# Altium PCB Adapter.PcbDoc
Units mm, origin at the board's own origin, x right, y up, seen from the top; angles counter-clockwise.
Board outline 6.73 x 7.49 mm, 2 copper layers (Top Layer, Bottom Layer); 2 components, 4 nets, 11 pads, 4 vias.
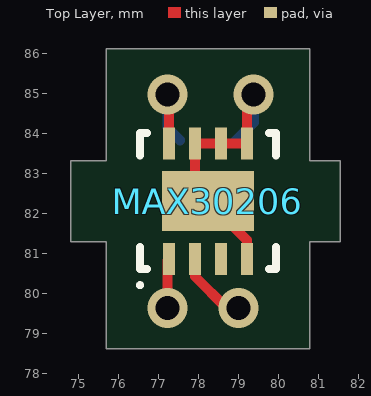
[diagram p0: Top Layer view]
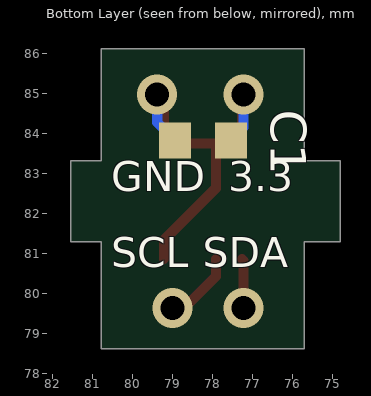
[diagram p1: Bottom Layer view, seen from below]

## Layer stack, top to bottom
Top Solder: solder mask 0.0102, Solder Resist, Dk 3.5
Top Layer: signal copper 0.0356
Dielectric 1: dielectric 0.32, FR-4, Dk 4.8
Bottom Layer: signal copper 0.0356
Bottom Solder: solder mask 0.0102, Solder Resist, Dk 3.5

## Board outline
74.803,81.28 74.803,83.312 75.692,83.312 75.692,86.106 80.772,86.106 80.772,83.312 81.534,83.312 81.534,81.28 80.772,81.28 80.772,78.613 75.692,78.613 75.692,81.28

## Design rules (kind name [scope] priority, off if disabled: settings)
Clearance [All] p1: gap=0.254 ignorepadtopadclearanceinfootprint=FALSE except(0: Arc-Hole Track-Hole SMDPad-Hole THPad-Hole Via-Hole Fill-Hole Poly-Hole Region-Hole Text-Hole)
PolygonConnect [All] p1: connectstyle=Relief reliefconductorwidth=0.254 reliefentries=4 polygonreliefangle="90 Angle" airgapwidth=0.254
RoutingVias [All] p1: holewidth=0.711 width=1.27 viastyle="Through Hole" minholewidth=0.711 minwidth=1.27 maxholewidth=0.711 maxwidth=1.27
SolderMaskExpansion [All] p1: expansion=0.102
Width [All] p1: maxlimit=0.254 minlimit=0.254 preferedwidth=0.254
30 further rules are at their usual default settings.

## Components (designator, comment, footprint, x,y, rotation, side; value= is the part's Value field where it differs from the comment)
C1 "Cap" "0603 Cap" 78.232,83.82 r180 bottom value=100n
MAX30206 "MAX30205" MAX30205 78.232,82.296 r90 top

## Footprints (in the part's own frame and the unit in brackets; to place one, negate y for a bottom-side part, rotate by r counter-clockwise, add the part's x,y. Pads: shape width x height; smd on the part's side, far side on the other; paste and mask are expansions set on the pad)
"0603 Cap" [mm] "Chip Capacitor, Body 1.6x0.8mm, IPC High Density"
  rect 0.8x0.9 smd: 1(-0.7,0) 2(0.7,0)
  body extent -0.8,-0.4 0.8,0.4, height 0.78
MAX30205 [mm] "SON, 8-Leads, Body 3,00x3,00mm, Pitch 0,65mm, Thermal Pad 2,30x1,50mm, IPC Medium Density"
  rect 0.8x0.3 smd mask+0: 1(-1.445,0.975) 2(-1.445,0.325) 3(-1.445,-0.325) 4(-1.445,-0.975) 5(1.445,-0.975) 6(1.445,-0.325) 7(1.445,0.325) 8(1.445,0.975)
  rect 1.5x2.3 smd: 9(0,0)
  silkscreen extent -2.15,-1.7 1.7,1.75, body extent -1.55,-1.55 1.55,1.55, height 0.8

## Part data
MAX30206: Supplier 1=Farnell, Supplier Part Number 1=MAX30205

## Via types
v1: diameter 1, hole 0.6, Top Layer to Bottom Layer, 4 vias

## Nets (pads, with @x,y where several pads share a name; then routed paths per layer and width w, separated by ;. In a path a pad name is that pad's centre, name@x,y a point inside that pad or via, vN(x,y) a via of type N, cw(c..) or ccw(c..) an arc to the next point about the centre after c; other vN are vias at no path point)
GND: C1.1 MAX30206.4 MAX30206.5 MAX30206.6 MAX30206.7 MAX30206.9 | length 7.3
  Top Layer w0.254: MAX30206.4 79.207,81.321 MAX30206.9 77.907,82.621 MAX30206.7 MAX30206.6 MAX30206.5 79.207,84.795 v1(79.375,84.963)
  Bottom Layer w0.254: C1.1 79.375,84.263 v1(79.375,84.963)
SCL: MAX30206.2 | length 1.9
  Top Layer w0.254: MAX30206.2 77.907,80.412 78.69,79.629 v1(78.994,79.629)
SDA: MAX30206.1 | length 1.2
  Top Layer w0.254: v1(77.216,79.629) 77.216,80.81 MAX30206.1
VDD: C1.2 MAX30206.8 | length 2.5
  Top Layer w0.254: v1(77.216,84.963) 77.257,84.922 MAX30206.8
  Bottom Layer w0.254: v1(77.216,84.963) 77.216,84.136 C1.2
pads on no net: MAX30206.3

## Silkscreen, mask and mechanical layers (free items; w line width, h text height)
Bottom Overlay:
  text "3.3" at 77.597,82.296 h1.28
  text "GND" at 80.518,82.296 h1.28
  text "SDA" at 78.232,80.391 h1.28
  text "SCL" at 80.518,80.391 h1.28
Mechanical 1:
  the board outline again, w0.254